# Altium PCB RC522_RFID.PcbDoc
Units mm, origin at the board's own origin, x right, y up, seen from the top; angles counter-clockwise.
Board outline 39.43 x 46.43 mm, 2 copper layers (Top Layer, Bottom Layer), stack 1.581 mm thick; 23 components, 22 nets, 87 pads, 32 vias.
Unrouted connection lines stored in the file: 13.
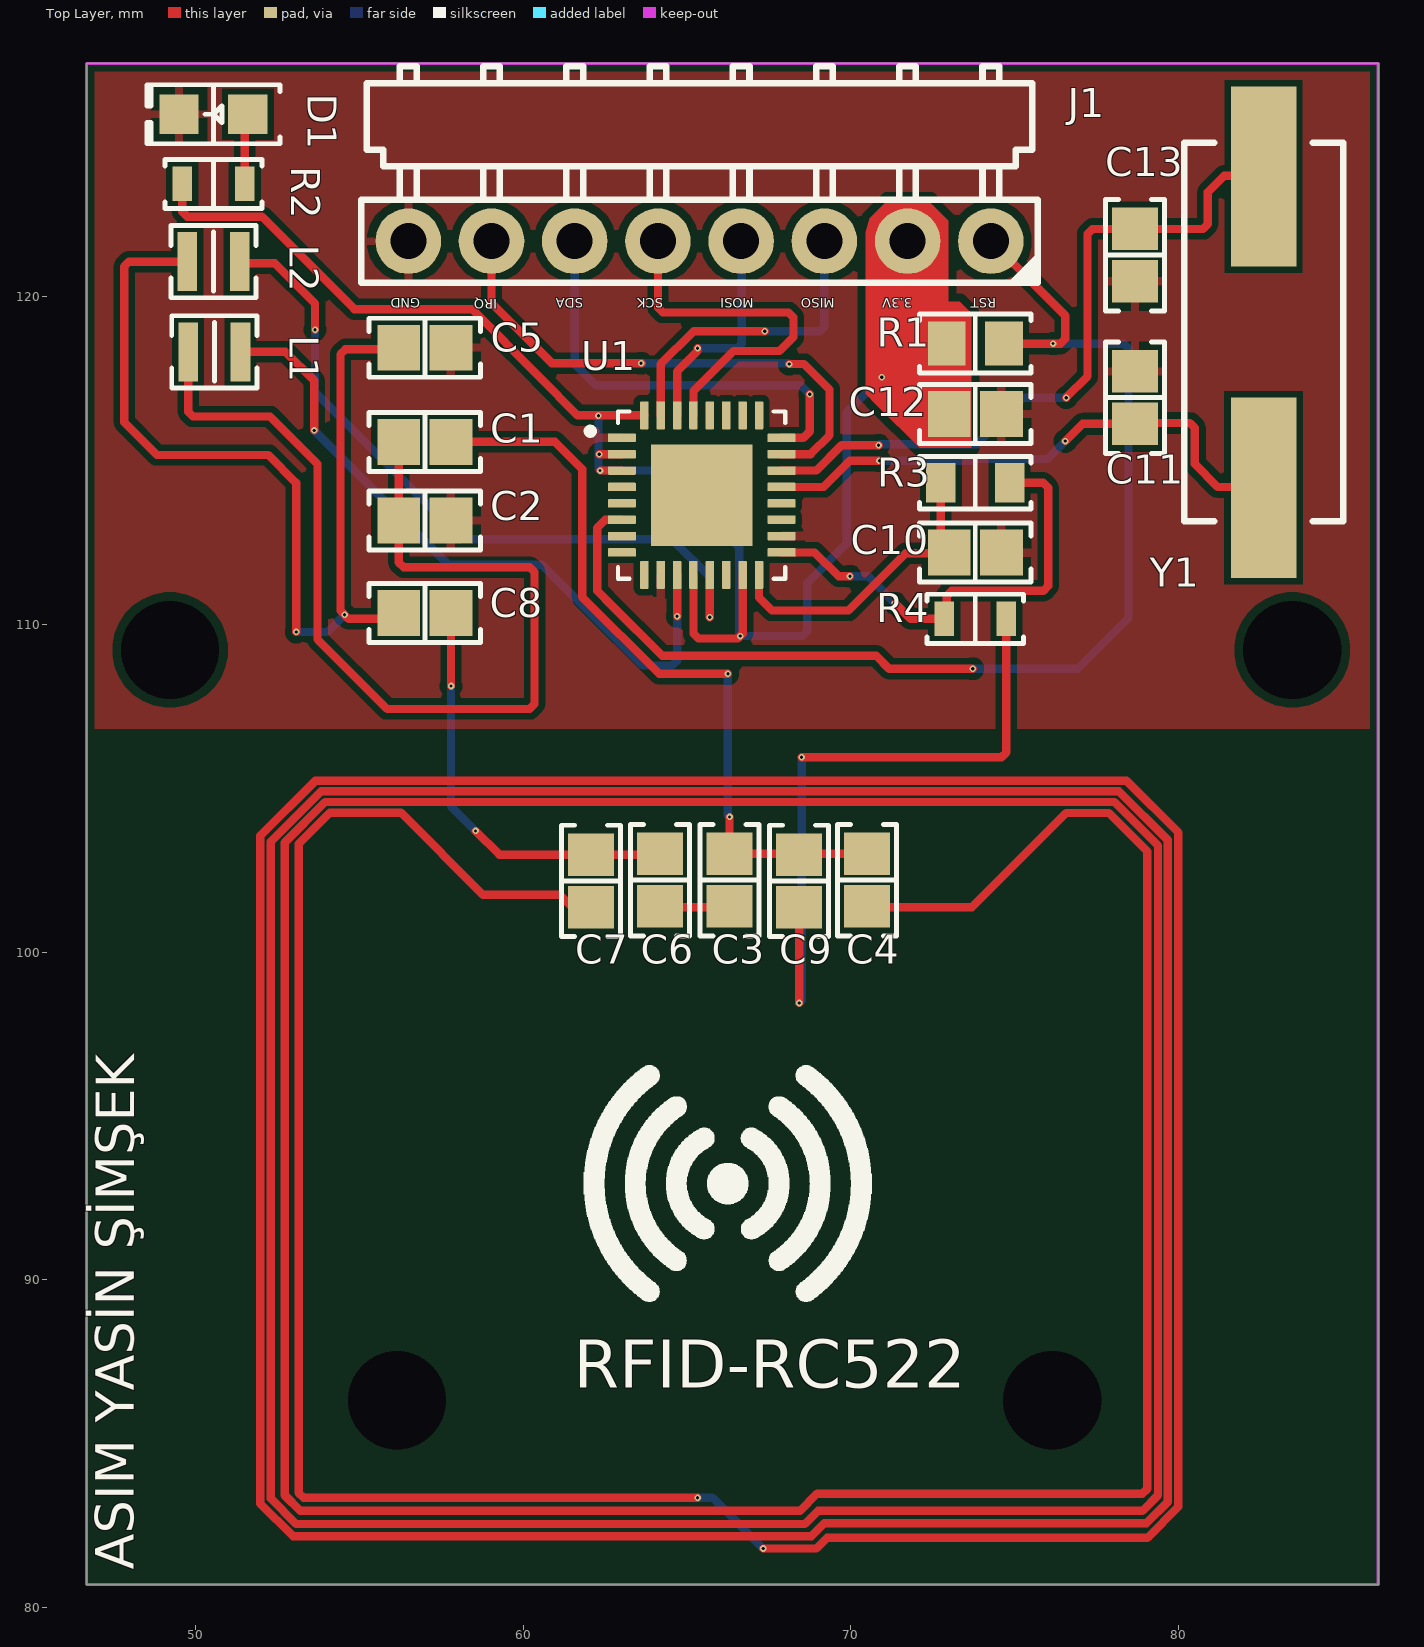
[diagram p0: Top Layer view]
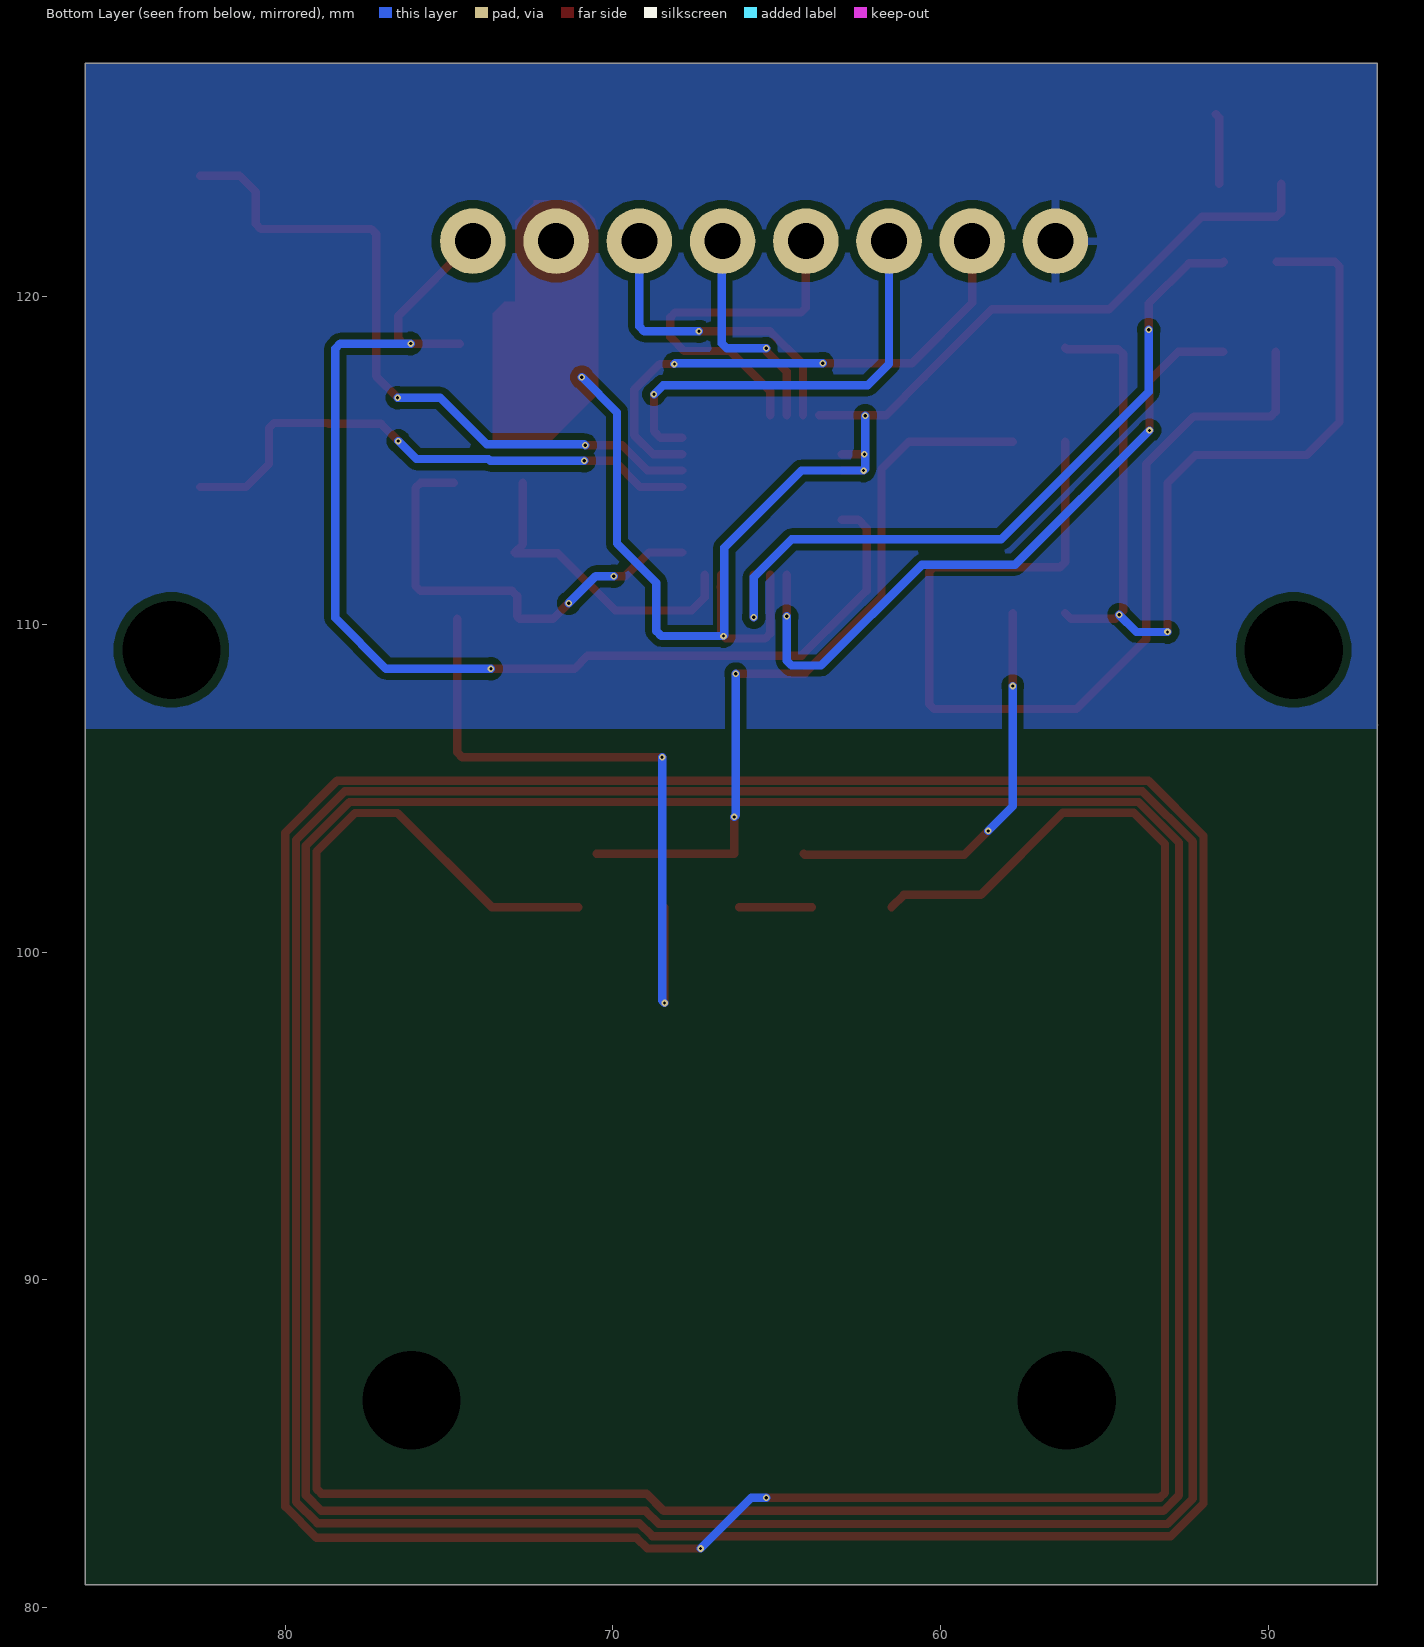
[diagram p1: Bottom Layer view, seen from below]
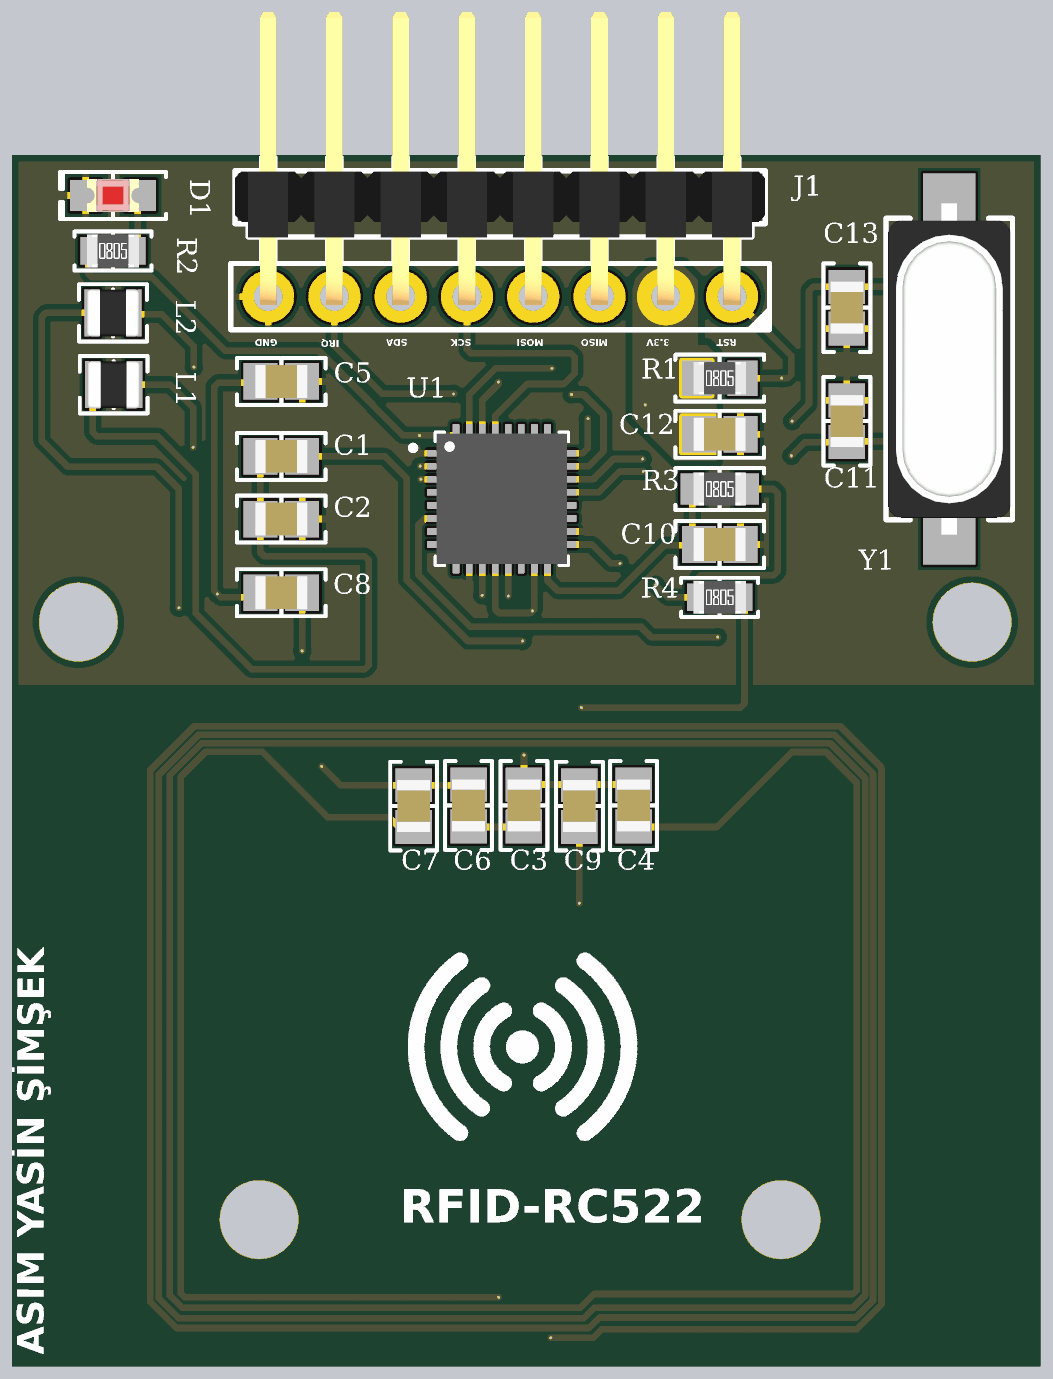
[diagram p2: 3D render of the assembled board from above, using the file's embedded part models]

## Layer stack, top to bottom
Top Solder: solder mask 0.0102, Solder Resist, Dk 3.5
Top Layer: signal copper 0.0356
Dielectric 1: dielectric 1.51, FR-4, Dk 4.8
Bottom Layer: signal copper 0.0356
Bottom Solder: solder mask 0.0102, Solder Resist, Dk 3.5

## Board outline
46.675,80.7 86.1,80.7 86.1,127.125 46.675,127.125

## Design rules (kind name [scope] priority, off if disabled: settings)
Clearance [All] p1: gap=0.2 ignorepadtopadclearanceinfootprint=TRUE except(0.15: Text-Text)
PolygonConnect [All] p1: connectstyle=Relief reliefconductorwidth=0.254 reliefentries=4 polygonreliefangle="90 Angle" airgapwidth=0.254
RoutingVias [All] p1: holewidth=0.11 width=0.25 viastyle="Through Hole" minholewidth=0.1 minwidth=0.2 maxholewidth=0.4 maxwidth=1.27
SolderMaskExpansion [All] p1: expansion=0.102 istentingtop=FALSE
Width [All] p1: maxlimit=0.254 minlimit=0.127 preferedwidth=0.2
30 further rules are at their usual default settings.

## Components (designator, comment, footprint, x,y, rotation, side; value= is the part's Value field where it differs from the comment)
C1 "15 pF" "CAP 0805_2012" 57,115.575 r0 top
C2 "47pF" "CAP 0805_2012" 57,113.175 r180 top
C3 "180 pF" "CAP 0805_2012" 66.3,102.2 r90 top
C4 "10pF" "CAP 0805_2012" 70.5,102.2 r90 top
C5 "47pF" "CAP 0805_2012" 57,118.448 r0 top
C6 "6 pF" "CAP 0805_2012" 64.175,102.2 r270 top
C7 "150pF" "CAP 0805_2012" 62.075,102.175 r270 top
C8 "15 pF" "CAP 0805_2012" 57,110.35 r0 top
C9 "0.1 µF" "CAP 0805_2012" 68.425,102.175 r90 top
C10 "0.1 µF" "CAP 0805_2012" 73.8,112.2 r180 top
C11 "15 pF" "CAP 0805_2012" 78.675,116.925 r270 top
C12 "0.1 µF" "CAP 0805_2012" 73.8,116.425 r180 top
C13 "15 pF" "CAP 0805_2012" 78.675,121.275 r270 top
D1 "Red" "LED 0805_2012 RED" 50.55,125.575 r180 top
J1 "M20-9960845" "HARWIN M20-9960845" 65.385,121.7 r180 top
L1 "2.2 µH" "IND 0806_2016" 50.575,118.325 r180 top
L2 "2.2 µH" "IND 0806_2016" 50.55,121.075 r180 top
R1 "10 kOhms" "RES 0805_2012" 73.8,118.575 r0 top
R2 "470 Ohms" "YAGEO RES RK73 RS73 SG73 0805_2012" 50.55,123.45 r0 top
R3 "820 Ohms" "YAGEO RES 0805_2012" 73.8,114.325 r0 top
R4 "5.1 kOhms" "YAGEO RES RK73 RS73 SG73 0805_2012" 73.8,110.175 r0 top
U1 "MFRC522" MFRC522 65.45,113.95 r0 top
Y1 "27.12MHz" "TXC 9C" 82.6,118.925 r270 top

## Footprints (in the part's own frame and the unit in brackets; to place one, negate y for a bottom-side part, rotate by r counter-clockwise, add the part's x,y. Pads: shape width x height; smd on the part's side, far side on the other; paste and mask are expansions set on the pad)
"CAP 0805_2012" [mm] "Chip Capacitor, 2-Leads, Body 2.00x1.20mm, IPC Medium Density"
  rect 1.3x1.4 smd: 1(-0.8,0) 2(0.8,0)
  silkscreen extent -1.7,-0.9 1.7,0.9, body extent -1,-0.64 1,0.64, height 1.26
"HARWIN M20-9960845" [mm] "2.54mm DIL PC TAIL PIN HEADER ASSEMBLY"
  round 2 hole 1.1: 1(-8.89,0) 2(-6.35,0) 3(-3.81,0) 4(-1.27,0) 5(1.27,0) 6(3.81,0) 7(6.35,0) 8(8.89,0)
  silkscreen extent -10.32,-5.33 10.32,1.3, body extent -10.16,-10.9 10.16,0.32, height 2.54
"IND 0806_2016" [mm] "Chip Capacitor, 2-Leads, Body 2.00x1.20mm, IPC Medium Density"
  rect 0.6x1.8 smd: 1(-0.8,0) 2(0.8,0)
  silkscreen extent -1.3,-1.1 1.3,1.1, body extent -1.01,-0.91 1.01,0.91, height 1.81
"LED 0805_2012 RED" [mm] "Chip Diode, 2-Leads, Body 2.00x1.25mm, IPC Medium Density"
  rect 1.2x1.2 smd: 1(-1.05,0) 2(1.05,0)
  silkscreen extent -2.03,-0.9 2.03,0.9, body extent -1,-0.62 1,0.63, height 0.9
MFRC522 [mm] "MFRC522 RFID"
  rrect25% 0.86x0.26 smd: 1(-2.435,1.75) 2(-2.435,1.25) 3(-2.435,0.75) 4(-2.435,0.25) 5(-2.435,-0.25) 6(-2.435,-0.75) 7(-2.435,-1.25) 8(-2.435,-1.75) 17(2.435,-1.75) 18(2.435,-1.25) 19(2.435,-0.75) 20(2.435,-0.25) 21(2.435,0.25) 22(2.435,0.75) 23(2.435,1.25) 24(2.435,1.75)
  rrect25% 0.26x0.86 smd: 9(-1.75,-2.435) 10(-1.25,-2.435) 11(-0.75,-2.435) 12(-0.25,-2.435) 13(0.25,-2.435) 14(0.75,-2.435) 15(1.25,-2.435) 16(1.75,-2.435) 25(1.75,2.435) 26(1.25,2.435) 27(0.75,2.435) 28(0.25,2.435) 29(-0.25,2.435) 30(-0.75,2.435) 31(-1.25,2.435) 32(-1.75,2.435)
  rect 3.1x3.1 smd paste-3: ""(0,0)
  silkscreen extent -3.5,-2.55 2.55,2.55, body extent -2.5,-2.5 2.5,2.5, height 1
"RES 0805_2012" [mm] "Chip Resistor, 2-Leads, Body 2.00x1.25mm, IPC Medium Density"
  rect 1.15x1.35 smd: 1(-0.875,0) 2(0.875,0)
  silkscreen extent -1.7,-0.9 1.7,0.9, body extent -1,-0.62 1,0.63, height 0.6
"TXC 9C" [mm] "Crystal, 2-Leads, Body 4.70x11.40mm, Pitch 8.80mm, IPC Medium Density"
  rect 5.5x2 smd: 1(-4.75,0) 2(4.75,0)
  silkscreen extent -5.77,-2.43 5.78,2.43, body extent -6.35,-2.35 6.35,2.35, height 4.2
"YAGEO RES 0805_2012" [mm] "Chip Resistor, 2-Leads, Body 2.00x1.25mm"
  rect 0.9x1.2 smd: 1(-1.05,0) 2(1.05,0)
  silkscreen extent -1.7,-0.8 1.7,0.8, body extent -1,-0.62 1,0.63, height 0.6
"YAGEO RES RK73 RS73 SG73 0805_2012" [mm] "Chip Resistor, 2-Leads, Body 2.00x1.25mm"
  rect 0.6x1.05 smd: 1(-0.95,0) 2(0.95,0)
  silkscreen extent -1.48,-0.75 1.48,0.75, body extent -1,-0.62 1,0.63, height 0.6

## Part data
C1 C8 C11 C13: library part 885012007029, "CAP CER 15PF 25V C0G/NP0 0805", Device Package="0805 (2012 Metric)", manufacturer="Würth Elektronik", Operating Temperature="-55°C ~ 125°C", Supplier Part Number 1=732-7828-1-ND, Temperature Coefficient="C0G, NP0", Tolerance=±5%, Voltage - Rated=25V, Applications="General Purpose", Capacitance="15 pF", componentlink1description=Datasheet, componentlink1url=https://katalog.we-online.de/pbs/datasheet/885012007029.pdf, componentlink2description="DigiKey Link", componentlink2url=https://www.digikey.com/en/products/detail/würth-elektronik/885012007029/5453683, lastupdated="9.02.2024 20:16:04", Lifecycle Status=Active, Minimum Order=1, Mounting Type="Surface Mount, MLCC", Package / Case="0805 (2012 Metric)", packaging=TapeAndReel, Part Number=885012007029, Part Status=Active, partid=4245, price=0.03, series=WCAP-CSGP, Size / Dimension="0.079\" L x 0.049\" W (2.00mm x 1.25mm)", Supplier 1=DigiKey, Thickness (Max)="0.028\" (0.70mm)"
C2 C5: library part 08055A470KAT2A, "CAP CER 47PF 50V C0G/NP0 0805", Device Package="0805 (2012 Metric)", manufacturer="AVX Corporation", Operating Temperature="-55°C ~ 125°C", Supplier Part Number 1=478-7955-1-ND, Temperature Coefficient="C0G, NP0", Tolerance=±10%, Voltage - Rated=50V, Applications="General Purpose", Capacitance=47pF, componentlink1description=Datasheet, componentlink1url=http://datasheets.avx.com/C0GNP0-Dielectric.pdf, componentlink2description="DigiKey Link", componentlink2url=http://digikey.com/product-detail/en/avx-corporation/08055A470KAT2A/478-7955-1-ND/3881578, lastupdated="2.09.2020 01:04:33", Lifecycle Status=Active, Minimum Order=1, Mounting Type="Surface Mount, MLCC", Package / Case="0805 (2012 Metric)", packaging=TapeAndReel, Part Number=08055A470KAT2A, Part Status=Active, partid=7689, price=0.04, series=-, Size / Dimension="0.079\" L x 0.049\" W (2.00mm x 1.25mm)", Supplier 1=DigiKey, Thickness (Max)="0.037\" (0.94mm)"
C3: library part VJ0805Y181KXAPW1BC, "CAP CER 180PF 50V X7R 0805", Device Package="0805 (2012 Metric)", manufacturer="Vishay Vitramon", Operating Temperature="-55°C ~ 125°C", Supplier Part Number 1=720-VJ0805Y181KXAPW1BCCT-ND, Temperature Coefficient=X7R, Tolerance=±10%, Voltage - Rated=50V, Applications="General Purpose", Capacitance="180 pF", componentlink1description=Datasheet, componentlink1url=https://www.vishay.com/docs/28548/vjw1bcbascomseries.pdf, componentlink2description="DigiKey Link", componentlink2url=https://www.digikey.com/en/products/detail/vishay-vitramon/VJ0805Y181KXAPW1BC/8311623, lastupdated="9.02.2024 20:15:03", Lifecycle Status=Active, Minimum Order=1, Mounting Type="Surface Mount, MLCC", Package / Case="0805 (2012 Metric)", packaging=TapeAndReel, Part Number=VJ0805Y181KXAPW1BC, Part Status=Active, partid=31661, price=0.04, series="VJ W1BC", Size / Dimension="0.079\" L x 0.049\" W (2.00mm x 1.25mm)", Supplier 1=DigiKey, Thickness (Max)="0.035\" (0.90mm)"
C4: library part 08055C100KAT2A, "CAP CER 10PF 50V X7R 0805", Device Package="0805 (2012 Metric)", manufacturer="AVX Corporation", Operating Temperature="-55°C ~ 125°C", Supplier Part Number 1=478-11897-1-ND, Temperature Coefficient=X7R, Tolerance=±10%, Voltage - Rated=50V, Applications="General Purpose", Capacitance=10pF, componentlink1description=Datasheet, componentlink1url=http://datasheets.avx.com/X7RDielectric.pdf, componentlink2description="DigiKey Link", componentlink2url=http://digikey.com/product-detail/en/avx-corporation/08055C100KAT2A/478-11897-1-ND/8573533, lastupdated="2.09.2020 01:04:33", Lifecycle Status=Active, Minimum Order=1, Mounting Type="Surface Mount, MLCC", Package / Case="0805 (2012 Metric)", packaging=TapeAndReel, Part Number=08055C100KAT2A, Part Status=Active, partid=7680, price=0.04, series=-, Size / Dimension="0.079\" L x 0.049\" W (2.01mm x 1.25mm)", Supplier 1=DigiKey, Thickness (Max)="0.037\" (0.94mm)"
C6: library part CC0805DRNPO9BN6R0, "CAP CER 6PF 50V C0G/NPO 0805", Device Package="0805 (2012 Metric)", manufacturer=Yageo, Operating Temperature="-55°C ~ 125°C", Supplier Part Number 1=311-1095-1-ND, Temperature Coefficient="C0G, NP0", Tolerance=±0.5pF, Voltage - Rated=50V, Applications="General Purpose", Capacitance="6 pF", componentlink1description=Datasheet, componentlink1url=https://www.yageo.com/upload/media/product/productsearch/datasheet/mlcc/UPY-GP_NP0_16V-to-50V_17.pdf, componentlink2description="DigiKey Link", componentlink2url=https://www.digikey.com/en/products/detail/yageo/CC0805DRNPO9BN6R0/302829, lastupdated="9.02.2024 20:15:53", Lifecycle Status=Active, Minimum Order=1, Mounting Type="Surface Mount, MLCC", Package / Case="0805 (2012 Metric)", packaging=TapeAndReel, Part Number=CC0805DRNPO9BN6R0, Part Status=Active, partid=44312, price=0.01, series=CC, Size / Dimension="0.079\" L x 0.049\" W (2.00mm x 1.25mm)", Supplier 1=DigiKey, Thickness (Max)="0.024\" (0.60mm)"
C7: library part 08055C151KAT2A, "CAP CER 150PF 50V X7R 0805", Device Package="0805 (2012 Metric)", manufacturer="AVX Corporation", Operating Temperature="-55°C ~ 125°C", Supplier Part Number 1=478-10547-1-ND, Temperature Coefficient=X7R, Tolerance=±10%, Voltage - Rated=50V, Applications="General Purpose", Capacitance=150pF, componentlink1description=Datasheet, componentlink1url=http://datasheets.avx.com/X7RDielectric.pdf, componentlink2description="DigiKey Link", componentlink2url=http://digikey.com/product-detail/en/avx-corporation/08055C151KAT2A/478-10547-1-ND/6797477, lastupdated="2.09.2020 01:04:40", Lifecycle Status=Active, Minimum Order=1, Mounting Type="Surface Mount, MLCC", Package / Case="0805 (2012 Metric)", packaging=TapeAndReel, Part Number=08055C151KAT2A, Part Status=Active, partid=3187, price=0.02, series=-, Size / Dimension="0.079\" L x 0.049\" W (2.01mm x 1.25mm)", Supplier 1=DigiKey, Thickness (Max)="0.037\" (0.94mm)"
C9 C10 C12: library part VJ0805Y104KXXCW1BC, "CAP CER 0.1UF 25V X7R 0805", Device Package="0805 (2012 Metric)", manufacturer="Vishay Vitramon", Operating Temperature="-55°C ~ 125°C", Supplier Part Number 1=720-1537-1-ND, Temperature Coefficient=X7R, Tolerance=±10%, Voltage - Rated=25V, Applications="General Purpose", Capacitance="0.1 µF", componentlink1description=Datasheet, componentlink1url=https://www.vishay.com/docs/28548/vjw1bcbascomseries.pdf, componentlink2description="DigiKey Link", componentlink2url=https://www.digikey.com/en/products/detail/vishay-vitramon/VJ0805Y104KXXCW1BC/420914, lastupdated="9.02.2024 20:15:21", Lifecycle Status=Active, Minimum Order=1, Mounting Type="Surface Mount, MLCC", Package / Case="0805 (2012 Metric)", packaging=TapeAndReel, Part Number=VJ0805Y104KXXCW1BC, Part Status=Active, partid=17950, price=0.04, series="VJ W1BC", Size / Dimension="0.079\" L x 0.049\" W (2.00mm x 1.25mm)", Supplier 1=DigiKey, Thickness (Max)="0.037\" (0.95mm)"
D1: library part 5988120107F, "LED RED CLEAR 0805 SMD", Current - Test=20mA, Device Package="0805 (2012 Metric)", Lens Color=Colorless, manufacturer=Dialight, Millicandela Rating=150mcd, Supplier Device Package=0805, Supplier Part Number 1=350-2039-1-ND, Voltage - Forward (Vf) (Typ)=2V, Color=Red, componentlink1description=Datasheet, componentlink1url=//media.digikey.com/pdf/Data%20Sheets/Dialight%20PDFs/598_Series_0805_Pkg.pdf, componentlink2description="DigiKey Link", componentlink2url=https://www.digikey.com/en/products/detail/dialight/5988120107F/1291273, Configuration=Standard, Height (Max)=0.80mm, lastupdated="3.06.2024 20:00:07", Lens Size="1.40mm x 1.25mm", Lens Style="Rectangle with Flat Top", Lens Transparency=Clear, Lifecycle Status=Active, Minimum Order=1, Mounting Type="Surface Mount", Package / Case="0805 (2012 Metric)", packaging=TapeAndReel, Part Number=5988120107F, Part Status=Active, partid=309, price=0.05, series=598, Size / Dimension="2.00mm L x 1.25mm W", Supplier 1=DigiKey, Viewing Angle=140°, Wavelength - Dominant=625nm
J1: "CONN HEADER R/A 8POS 2.54MM", Current Rating (Amps)="3A per Contact", manufacturer="Harwin Inc.", Material Flammability Rating="UL94 V-0", Operating Temperature="-40°C ~ 105°C", Supplier Part Number 1=952-2249-ND, Insulation Color=Black, componentlink1description=Datasheet, componentlink1url=https://cdn.harwin.com/pdfs/Harwin_PC_Connectors_M20.pdf, componentlink2description="DigiKey Link", componentlink2url=https://www.digikey.com/en/products/detail/harwin-inc/M20-9960845/3728213, Connector Type="Header, Cuttable", Contact Finish - Mating=Gold, Contact Length - Mating="0.240\" (6.10mm)", Contact Length - Post="0.118\" (3.00mm)", Contact Material=Brass, Contact Shape=Square, Contact Type="Male Pin", Fastening Type=Push-Pull, lastupdated="21.09.2022 19:24:16", Lifecycle Status=Active, Minimum Order=1, Mounting Type="Through Hole, Right Angle", Number of Positions=8, Number of Positions Loaded=All, Number of Rows=1, packaging=Bulk, Part Number=M20-9960845, Part Status=Active, partid=171, Pitch - Mating="0.100\" (2.54mm)", price=0.20, Row Spacing - Mating="-40°C ~ 105°C", series=M20, Shrouding=Unshrouded, Style="Board to Board or Cable", Supplier 1=DigiKey, Termination=Solder, Insulation Height="0.100\" (2.54mm)", Insulation Material="Polyamide (PA6T), Nylon 6T"
L1 L2: library part WPN201610U2R2MTY01, "FIXED IND 2.2UH 2A 138 MOHM SMD", Current Rating (Amps)="2 A", DC Resistance (DCR)="138mOhm Max", Device Package="0806 (2016 Metric)", Frequency - Self Resonant=44MHz, manufacturer="Shenzhen Sunlord Electronics Co., Ltd.", Operating Temperature="-40°C ~ 125°C", Supplier Device Package=0806, Supplier Part Number 1=3442-WPN201610U2R2MTY01CT-ND, Tolerance=±20%, Inductance Frequency - Test="1 MHz", componentlink1description=Datasheet, componentlink1url=https://www.sunlordinc.com/Download.aspx?file=L1VwbG9hZEZpbGVzL1BERl9DYXQvMjAyMDA3MDcxNTI5MjQ4NTUucGRm&lan=, componentlink2description="DigiKey Link", componentlink2url=https://www.digikey.com/en/products/detail/shenzhen-sunlord-electronics-co-ltd/WPN201610U2R2MTY01/14120427, Height - Seated (Max)="0.039\" (1.00mm)", lastupdated="3.06.2024 20:14:08", Lifecycle Status=Active, Material - Core=Ferrite, Minimum Order=1, Mounting Type="Surface Mount", Package / Case="0806 (2016 Metric)", packaging=TapeAndReel, Part Number=WPN201610U2R2MTY01, Part Status=Active, partid=5370, price=0.15, series=WPN, Shielding=Shielded, Size / Dimension="0.079\" L x 0.063\" W (2.00mm x 1.60mm)", Supplier 1=DigiKey, Type="Drum Core, Wirewound", Inductance="2.2 µH"
R1: library part SDR10EZPF1002, "RES 10K OHM 1% 1/2W 0805", Device Package="0805 (2012 Metric)", manufacturer="Rohm Semiconductor", Operating Temperature="-55°C ~ 155°C", Power (Watts)="0.5W, 1/2W", Ratings=AEC-Q200, Supplier Device Package=0805, Supplier Part Number 1=511-SDR10EZPF1002CT-ND, Temperature Coefficient=±100ppm/°C, Tolerance=±1%, componentlink2description="DigiKey Link", componentlink2url=https://www.digikey.com/en/products/detail/rohm-semiconductor/SDR10EZPF1002/18674792, Composition="Thick Film", Features="Automotive AEC-Q200, Pulse Withstanding", Height - Seated (Max)="0.026\" (0.65mm)", lastupdated="8.02.2024 21:00:06", Lifecycle Status=Active, Minimum Order=1, Number of Terminations=2, Package / Case="0805 (2012 Metric)", packaging=TapeAndReel, Part Number=SDR10EZPF1002, Part Status=Active, partid=76828, price=0.03, Resistance="10 kOhms", series=SDR, Size / Dimension="0.079\" L x 0.049\" W (2.00mm x 1.25mm)", Supplier 1=DigiKey
R2: library part SG73P2ATTD4700F, "RES 470 OHM 1% 1/2W 0805", Device Package="0805 (2012 Metric)", manufacturer="KOA Speer Electronics, Inc.", Operating Temperature="-55°C ~ 155°C", Power (Watts)="0.5W, 1/2W", Ratings=AEC-Q200, Supplier Device Package=0805, Supplier Part Number 1=2019-SG73P2ATTD4700FCT-ND, Temperature Coefficient=±100ppm/°C, Tolerance=±1%, componentlink1description=Datasheet, componentlink1url=https://www.koaspeer.com/pdfs/SG73P.pdf, componentlink2description="DigiKey Link", componentlink2url=https://www.digikey.com/en/products/detail/koa-speer-electronics-inc/SG73P2ATTD4700F/10188391, Composition="Thick Film", Features="Automotive AEC-Q200, Pulse Withstanding", Height - Seated (Max)="0.024\" (0.60mm)", lastupdated="25.07.2024 09:45:15", Lifecycle Status=Active, Minimum Order=1, Number of Terminations=2, Package / Case="0805 (2012 Metric)", packaging=TapeAndReel, Part Number=SG73P2ATTD4700F, Part Status=Active, partid=61085, price=0.02, Resistance="470 Ohms", series=SG73P, Size / Dimension="0.079\" L x 0.049\" W (2.00mm x 1.25mm)", Supplier 1=DigiKey
R3: library part SR0805FR-47820RL, "RES 820 OHM 1% 1/2W 0805", Device Package="0805 (2012 Metric)", manufacturer=Yageo, Operating Temperature="-55°C ~ 155°C", Power (Watts)="0.5W, 1/2W", Ratings=AEC-Q200, Supplier Device Package=0805, Supplier Part Number 1=YAG6176CT-ND, Temperature Coefficient=±100ppm/°C, Tolerance=±1%, componentlink1description=Datasheet, componentlink1url=http://www.yageo.com/NewPortal/_en/search/productDocs.jsp?YageoPartNumber=SR0805FR-47820RL, componentlink2description="DigiKey Link", componentlink2url=https://www.digikey.com/en/products/detail/yageo/SR0805FR-47820RL/9696414, Composition="Thick Film", Features="Automotive AEC-Q200, Pulse Withstanding", Height - Seated (Max)="0.024\" (0.60mm)", lastupdated="25.07.2024 09:20:20", Lifecycle Status=Active, Minimum Order=1, Number of Terminations=2, Package / Case="0805 (2012 Metric)", packaging=TapeAndReel, Part Number=SR0805FR-47820RL, Part Status=Active, partid=40903, price=0.14, Resistance="820 Ohms", series=SR, Size / Dimension="0.079\" L x 0.049\" W (2.00mm x 1.25mm)", Supplier 1=DigiKey
R4: library part SG73P2ATTD5101F, "RES 5.1K OHM 1% 1/2W 0805", Device Package="0805 (2012 Metric)", manufacturer="KOA Speer Electronics, Inc.", Operating Temperature="-55°C ~ 155°C", Power (Watts)="0.5W, 1/2W", Ratings=AEC-Q200, Supplier Device Package=0805, Supplier Part Number 1=2019-SG73P2ATTD5101FCT-ND, Temperature Coefficient=±100ppm/°C, Tolerance=±1%, componentlink1description=Datasheet, componentlink1url=https://www.koaspeer.com/pdfs/SG73P.pdf, componentlink2description="DigiKey Link", componentlink2url=https://www.digikey.com/en/products/detail/koa-speer-electronics-inc/SG73P2ATTD5101F/10188303, Composition="Thick Film", Features="Automotive AEC-Q200, Pulse Withstanding", Height - Seated (Max)="0.024\" (0.60mm)", lastupdated="25.07.2024 09:45:07", Lifecycle Status=Active, Minimum Order=1, Number of Terminations=2, Package / Case="0805 (2012 Metric)", packaging=TapeAndReel, Part Number=SG73P2ATTD5101F, partid=90019, price=0.02, Resistance="5.1 kOhms", series=SG73P, Size / Dimension="0.079\" L x 0.049\" W (2.00mm x 1.25mm)", Supplier 1=DigiKey
Y1: library part 9C-27.120MAAJ-T, "CRYSTAL 27.1200MHZ 18PF SMD", ESR (Equivalent Series Resistance)="30 Ohms", Frequency Stability=±30ppm, Load Capacitance=18pF, manufacturer="TXC CORPORATION", Operating Mode=Fundamental, Operating Temperature="-20°C ~ 70°C", Package / Case=HC-49S, Supplier Part Number 1=887-2446-1-ND, componentlink1description=Datasheet, componentlink1url=http://www.txccorp.com/download/products/quartz_crystals/2015TXC_9C_32.pdf, componentlink2description="DigiKey Link", componentlink2url=http://digikey.com/product-detail/en/txc-corporation/9C-27.120MAAJ-T/887-2446-1-ND/4475495, Frequency=27.12MHz, Frequency Tolerance=±30ppm, Height - Seated (Max)="0.161\" (4.10mm)", lastupdated="3.06.2024 20:02:24", Lifecycle Status=Active, Minimum Order=1, Mounting Type="Surface Mount", packaging=TapeAndReel, Part Number=9C-27.120MAAJ-T, Part Status=Active, partid=700, price=0.19, series=9C, Size / Dimension="0.449\" L x 0.189\" W (11.40mm x 4.80mm)", Supplier 1=DigiKey, Type="MHz Crystal"

## Free pads (board coordinates)
  round 2 hole 3 mask+0.05: ""(49.225,109.225) ""(56.15,86.325) ""(76.15,86.325) ""(83.475,109.225)

## Via types
v1: diameter 0.2, hole 0.1, Top Layer to Bottom Layer, tented both sides, 32 vias

## Nets (pads, with @x,y where several pads share a name; then routed paths per layer and width w, separated by ;. In a path a pad name is that pad's centre, name@x,y a point inside that pad or via, vN(x,y) a via of type N, cw(c..) or ccw(c..) an arc to the next point about the centre after c; other vN are vias at no path point)
3.3V: C12.2 J1.2 R1.1 R2.1 U1.2 U1.3 U1.12 U1.15 U1.32 | length 44.5
  Top Layer w0.254: R2.1 49.6,122.599 49.749,122.45 52.025,122.45 54.85,119.625 58.436,119.625 60.5,117.561 60.5,117.55 61.665,116.385 U1.32 ; v1(62.325,115.2) U1.2 ; v1(62.35,114.7) U1.3 ; U1.12 65.2,109.724 65.349,109.575 66.551,109.575 v1(66.626,109.649) 66.7,109.724 U1.15@66.7,111.151 ; U1.15 66.703,111.512 66.703,111.151 U1.15@66.706,111.148
  Bottom Layer w0.254: v1(62.3,116.375) 62.3,114.75 v1(62.35,114.7) 64.25,114.7 66.6,112.35 66.6,109.675 v1(66.626,109.649) 68.526,109.649 68.675,109.798 68.675,111.275 69.875,112.475 69.875,116.475 v1(70.95,117.55)
GND: C2.1 C5.2 C10.1 C11.1 C12.1 C13.2 D1.2 J1.8 U1.1 U1.4 U1.5 U1.10 U1.14 U1.18
IRQ: J1.7 U1.23 | length 16.4
  Top Layer w0.254: J1.7 59.035,119.815 60.875,117.975 v1(63.6,117.975) v1@63.625,117.975 ; U1.23 68.775,115.2 69.35,115.775 69.35,117.175 68.575,117.95 v1(68.125,117.95)
  Bottom Layer w0.254: v1(63.6,117.975) 68.1,117.975 v1(68.125,117.95)
MISO: J1.3 U1.31 | length 9.6
  Top Layer w0.254: U1.31 64.2,117.946 65.204,118.95 v1(67.375,118.95)
  Bottom Layer w0.254: v1(67.375,118.95) 69.046,118.95 69.195,119.099 J1.3
MOSI: J1.4 U1.30 | length 6.8
  Top Layer w0.254: U1.30 64.7,117.725 65.325,118.35 v1(65.325,118.429)
  Bottom Layer w0.254: v1(65.325,118.429) 66.526,118.429 66.675,118.578 66.675,121.68 J1.4
NetC1_1: C1.1 C2.2 L1.2 | length 31.3
  Top Layer w0.254: L1.2 49.775,116.499 49.924,116.35 52.275,116.35 53.725,114.9 53.725,109.55 55.85,107.425 60.201,107.425 60.35,107.574 60.35,111.601 60.201,111.75 56.349,111.75 56.2,111.899 C2.2 C1.1
NetC1_2: C1.2 C3.2 C4.2 C9.2 | length 23.4
  Top Layer w0.254: C1.2 60.975,115.575 61.049,115.501 61.804,114.746 61.804,110.846 64.15,108.5 v1(66.25,108.5) ; v1(66.3,104.128) C3.2 68.45,103 C4.2
  Bottom Layer w0.254: v1(66.25,108.5) 66.25,104.178 v1(66.3,104.128)
NetC3_1: C3.1 C6.2 | length 2.2
  Top Layer w0.254: C6.2@63.925,101.375 C3.1@66.15,101.375
NetC4_1: C4.1 C7.2 | length 376.7
  Top Layer w0.254: C7.2@61.5,101.375 61.124,101.751 58.774,101.751 56.268,104.257 54.107,104.257 53.15,103.3 53.15,83.499 53.299,83.35 v1(65.325,83.35) ; v1(67.325,81.8) 68.95,81.8 69.275,82.125 79.05,82.125 80,83.075 80,103.65 78.418,105.232 53.657,105.232 51.975,103.55 51.975,83.175 52.975,82.175 68.8,82.175 69.2,82.575 79.025,82.575 79.675,83.225 79.675,103.425 78.189,104.911 53.836,104.911 52.3,103.375 52.3,83.325 53.075,82.55 68.6,82.55 69,82.95 78.9,82.95 79.375,83.425 79.375,103.25 78.043,104.582 53.957,104.582 52.725,103.35 52.725,83.425 53.2,82.95 68.45,82.95 68.975,83.475 78.901,83.475 79.05,83.624 79.05,103.075 77.875,104.25 76.575,104.25 73.7,101.375 C4.1@71.05,101.375
  Bottom Layer w0.254: v1(65.325,83.35) 65.775,83.35 v1(67.325,81.8)
NetC5_1: C5.1 C8.1 L2.2 | length 30.6
  Top Layer w0.254: L2.2 47.974,121.075 47.825,120.926 47.825,116.175 48.825,115.175 52.225,115.175 53.075,114.325 v1(53.075,109.775) ; C8.1 56.025,110.175 54.674,110.175 54.425,110.424 54.425,118.251 54.574,118.4 56.152,118.4 C5.1
  Bottom Layer w0.254: v1(53.075,109.775) 54.025,109.775 v1(54.549,110.299)
NetC6_1: C6.1 C7.1 C8.2 | length 12.9
  Top Layer w0.254: v1(57.8,108.125) C8.2 ; v1@58.55,103.699 59.274,102.975 C7.1 64.15,102.975 C6.1
  Bottom Layer w0.254: v1(57.8,108.125) 57.8,104.45 v1(58.55,103.7)
NetC9_1: C9.1 R4.2 | length 20.8
  Top Layer w0.254: v1(68.425,98.45) C9.1 ; v1(68.5,105.95) 74.601,105.95 74.75,106.099 R4.2
  Bottom Layer w0.254: v1(68.425,98.45) 68.5,98.525 v1(68.5,105.95)
NetC10_2: C10.2 R3.1 U1.16 | length 9.6
  Top Layer w0.254: U1.16 67.2,110.825 67.596,110.429 69.929,110.429 71.675,112.175 72.975,112.175 C10.2 72.75,112.45 R3.1
NetD1_1: D1.1 R2.2 | length 2.2
  Top Layer w0.254: R2.2 51.5,125.475 D1.1
NetJ1_1: J1.1 R1.2 U1.6 | length 37.1
  Top Layer w0.254: U1.6 62.512,113.2 62.258,112.946 62.258,111.034 62.734,110.559 64.242,109.05 70.775,109.05 71.175,108.65 v1(73.725,108.65) ; J1.1 76.55,119.425 76.55,118.724 76.401,118.575 v1(76.175,118.575) R1.2
  Bottom Layer w0.254: v1(73.725,108.65) 76.925,108.65 78.475,110.2 78.475,118.426 78.326,118.575 v1(76.175,118.575)
NetR3_2: R3.2 R4.1 U1.17 | length 14
  Top Layer w0.254: U1.17 68.9,112.2 69.625,111.475 v1(69.975,111.475) ; v1(71.35,110.65) 71.825,110.175 R4.1 72.925,110.25 72.925,110.876 73.076,111.027 75.876,111.027 76.025,111.176 76.025,114.176 75.876,114.325 R3.2
  Bottom Layer w0.254: v1(69.975,111.475) 70.525,111.475 v1(71.35,110.65)
OSCIN: C11.2 U1.21 Y1.2 | length 17
  Top Layer w0.254: U1.21 69.175,114.2 69.975,115 v1(70.875,115) ; v1(76.55,115.6) 77.075,116.125 C11.2 78.7,116.15 80.351,116.15 80.5,116.001 80.5,114.9 81.2,114.2 Y1.2@82.6,114.2
  Bottom Layer w0.254: v1(70.875,115) 73.75,115 73.8,115.05 76,115.05 v1(76.55,115.6)
OSCOUT: C13.1 U1.22 Y1.1 | length 21.6
  Top Layer w0.254: U1.22 68.95,114.7 69.725,115.475 v1(70.85,115.475) ; v1(76.575,116.925) 77.225,117.575 77.225,121.926 77.374,122.075 C13.1 80.751,122.075 80.9,122.224 80.9,123.2 81.4,123.7 Y1.1@82.6,123.7
  Bottom Layer w0.254: v1(70.85,115.475) 70.879,115.504 73.854,115.504 75.275,116.925 v1(76.575,116.925)
SCK: J1.5 U1.29 | length 11.4
  Top Layer w0.254: J1.5 64.115,119.674 64.264,119.525 68.101,119.525 68.25,119.376 68.25,118.775 67.825,118.35 66.425,118.35 65.2,117.125 U1.29
SDA: J1.6 U1.24 | length 13.4
  Top Layer w0.254: U1.24 68.55,115.7 68.75,115.9 v1(68.75,117.025)
  Bottom Layer w0.254: J1.6 61.575,117.95 62.225,117.3 68.475,117.3 v1(68.75,117.025)
TX1: L1.1 U1.11 | length 20.9
  Top Layer w0.254: L1.1 52.75,118.325 53.625,117.45 v1(53.625,115.925) ; v1(64.7,110.25) U1.11
  Bottom Layer w0.254: v1(53.625,115.925) 57.725,111.825 60.575,111.825 63.65,108.75 64.551,108.75 64.7,108.899 v1(64.7,110.25)
TX2: L2.1 U1.13 | length 22.4
  Top Layer w0.254: L2.1 51.4,121.025 52.425,121.025 53.65,119.8 v1(53.65,119) ; v1(65.7,110.225) U1.13
  Bottom Layer w0.254: v1(53.65,119) 53.65,117.1 58.15,112.6 64.55,112.6 65.7,111.45 v1(65.7,110.225)
pads on no net: U1. U1.7 U1.8 U1.9 U1.19 U1.20 U1.25 U1.26 U1.27 U1.28

## Polygon pours and split planes (outlines as drawn)
GND on Bottom Layer "GND_L02_P000" (solid, pour order 0): 46.675,127.125 86.1,127.125 86.1,106.825 46.525,106.825 46.675,106.975
GND on Top Layer "GND_L01_P001" (solid, pour order 1): 46.675,127.125 86.1,127.125 86.1,106.825 46.525,106.825 46.675,106.975

## Keep-outs
Top Layer:
  the board outline again, w0.1

## Other copper
Top Layer:
  region net 3.3V: 70.575,122.4 71.125,122.95 72.425,122.95 72.425,122.875 72.975,122.325 72.975,119.85 73.325,119.85 73.675,119.5 73.675,115.4 72.1,115.4 70.8,116.7 70.45,117.05 70.45,121.975

## Silkscreen, mask and mechanical layers (free items; w line width, h text height)
Top Overlay:
  drawing of 1877 lines, arcs and shapes, not listed
  text "GND" at 56.853,120.071 h0.5 r180
  text "SDA" at 61.83,120.071 h0.5 r180
  text "SCK" at 64.275,120.071 h0.5 r180
  text "MOSI" at 67.045,120.071 h0.5 r180
  text "MISO" at 69.51,120.071 h0.5 r180
  text "3.3V" at 71.88,120.071 h0.5 r180
  text "RST" at 74.445,120.071 h0.5 r180
  text "IRQ" at 59.215,120.029 h0.5 r180
  text "RFID-RC522" at 61.55,86.222 h2.5
  text "ASIM YASİN ŞİMŞEK" at 48.505,81.155 h2 r89.93